# EAGLE board PowerConversionBoard (EAGLE 9.6.2)
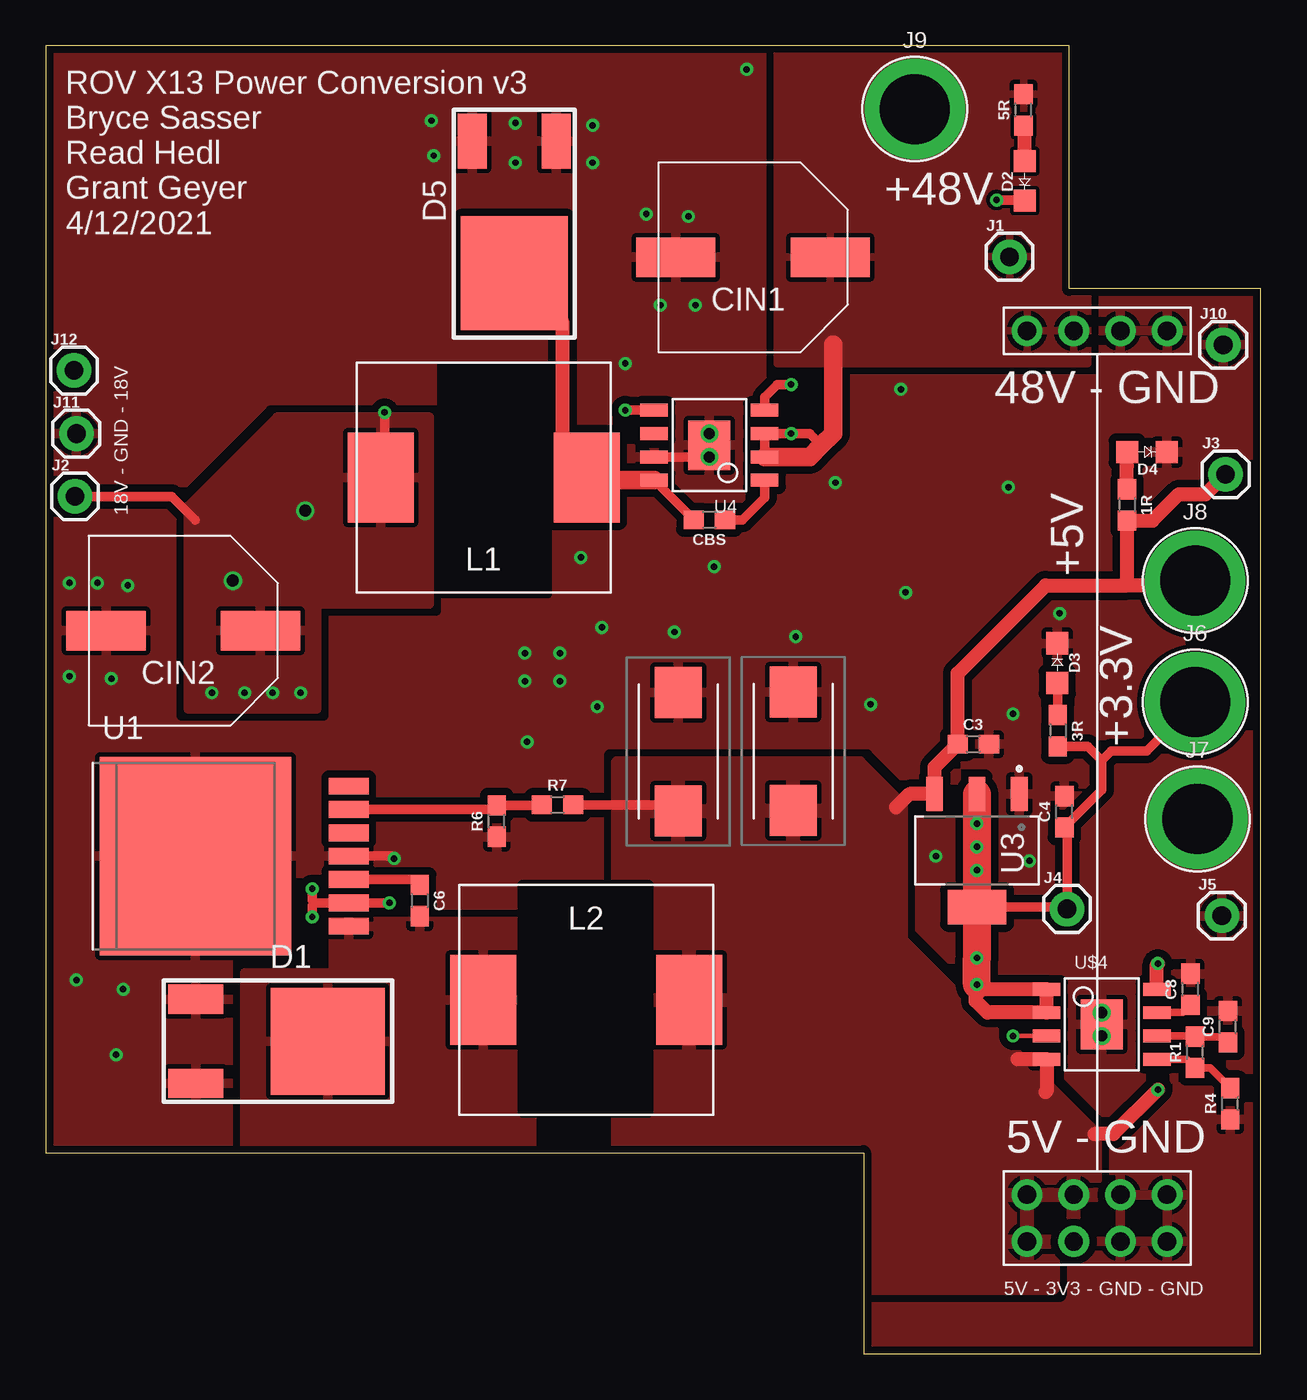
[diagram p0: board, top side]
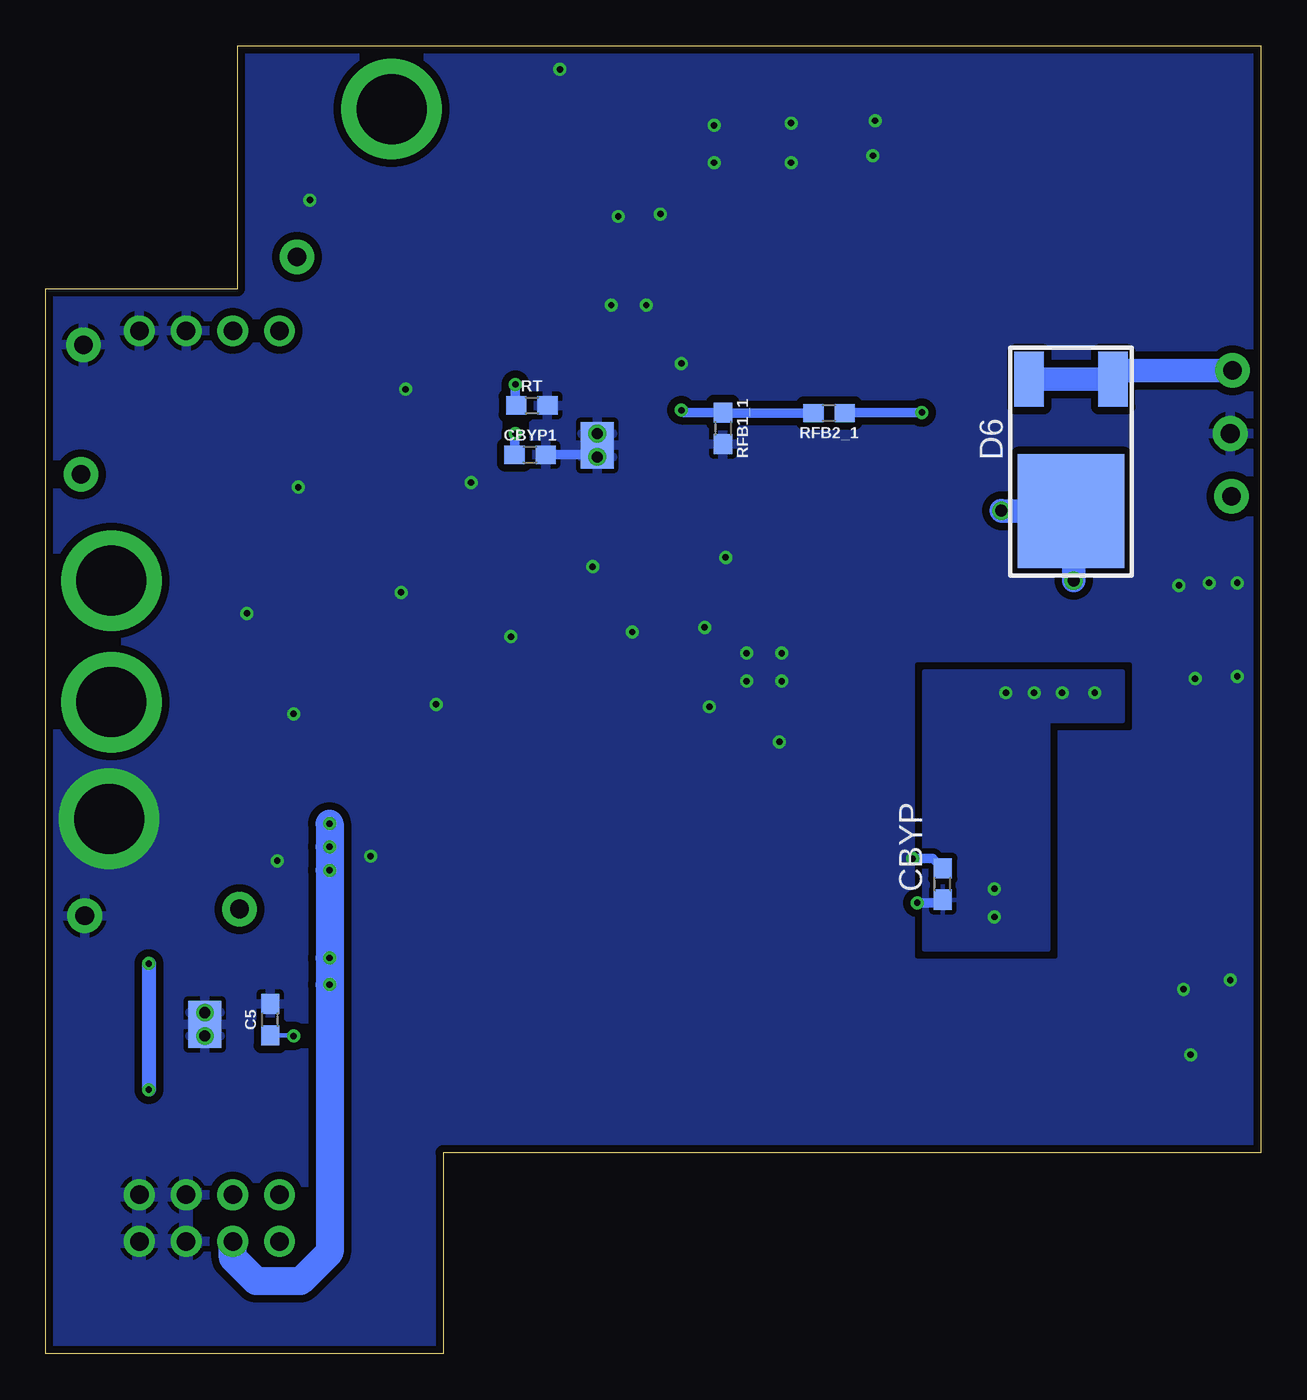
[diagram p1: board, bottom side, seen from below]

Size 66.04 x 71.12 mm. Coordinates in mm from the lower left corner, seen from the top.
Outline: 0,10.92 44.45,10.92 44.45,0 66.04,0 66.04,57.91 55.63,57.91 55.63,71.12 0,71.12 0,10.92
Copper layers (1*16): Top 0.0356mm / dielectric 1.5011mm / Bottom 0.0356mm
Design rules "ECE_Senior_Design": minimum track width 8mil, minimum drill 13mil, track to track 8mil, track to pad 8mil, pad to pad 6mil, via to via 8mil, smd to smd 6mil, copper to edge 15mil, drill to drill 8mil, minimum pad ring 7mil, minimum via ring 7mil, stop-mask expansion 3mil, vias tented up to drill 0mil, thermal gap 10mil

## Footprints (pad centres in the part's own frame; a part is rotated, then mirrored left to right if it is on the bottom)
0603 = smd 1.1 x 1: 1 -0.85,0; 2 0.85,0
CAPAE1030X1050N = smd 4.3 x 2.15: + -4.2,0; - 4.2,0
CTAN(7.30_4.30MM) = smd 2.77 x 2.55: + -3.22,0; - 3.22,0
DPAK-3 = smd 3 x 1.6: 1 -4.35,2.015; 3 -4.35,-2.555 | smd 6.2 x 5.8: 4 2.83,-0.27
0805 = smd 1.2 x 1.2: A 1.1,0; C -1.05,0
1X01 = drill 1.016 pad 1.88: 1 0,0
BANANA_CONN_NO_THERM = drill 3.81 pad 5.461: 1 0,0
HCMA1305 = smd 3.6 x 4.9: 1 -5.6,0; 2 5.6,0
D2PAK/TO-263 = smd 2.159 x 0.914: 1 8.331,-3.81; 2 8.331,-2.54; 3 8.331,-1.27; 4 8.331,0; 5 8.331,1.27; 6 8.331,2.54; 7 8.331,3.81 | smd 10.414 x 10.795: TAB 0,0
SOT230P700X180-4N = smd 1.86 x 0.9: 1 -3.075,2.3; 2 -3.075,0; 3 -3.075,-2.3 | smd 1.86 x 3.19: 4 3.075,0
8-SOIC-EP = smd 1.5 x 0.7: 1 -3,1.905; 2 -3,0.635; 3 -3,-0.635; 4 -3,-1.905; 5 3,-1.905; 6 3,-0.635; 7 3,0.635; 8 3,1.905 | smd 2.3 x 2.7: PAD 0,0 | smd 1.778 x 2.54 bottom: PAD_BOT 0,0 | drill 0.6: PAD_VIA1 0,0.635; PAD_VIA2 0,-0.635
CON2DIST = drill 1 pad 1.676: 1@1 -3.81,22.86; 1@2 -1.27,22.86; 2@1 1.27,22.86; 2@2 3.81,22.86; 3@1 -3.81,-26.67; 3@2 -3.81,-24.13; 3@3 -1.27,-24.13; 4 -1.27,-26.67; 5@1 1.27,-26.67; 5@2 1.27,-24.13; 5@3 3.81,-26.67; 5@4 3.81,-24.13

## Placement (x,y rotation side)
1R  470  [0603]  58.78,46.15 270 top
3R  470  [0603]  55.01,33.87 270 top
5R  5k  [0603]  53.15,67.64 90 top
C3  4.7uF  [0603]  50.42,33.15 0 top
C4  4.7uF  [0603]  55.37,29.46 90 top
C5  1.0uF  [0603]  53.85,18.16 90 bottom
C6  10nF  [0603]  20.32,24.64 270 top
C8  1.0uF  [0603]  62.23,19.81 90 top
C9  1.0uF  [0603]  64.26,17.78 90 top
CBS  0.1uF  [0603]  36.07,45.34 180 top
CBYP  1uF  [0603]  17.28,25.53 90 bottom
CBYP1  1uF  [0603]  39.72,48.88 0 bottom
CIN1  100uF  [CAPAE1030X1050N]  38.45,59.63 180 top
CIN2  47uF  [CAPAE1030X1050N]  7.46,39.32 180 top
COUT1_2  150uF  [CTAN(7.30_4.30MM)]  34.37,32.74 90 top
COUT2_2  150uF  [CTAN(7.30_4.30MM)]  40.64,32.77 90 top
D1  SWITCHMODE_SCHOTTKY  [DPAK-3]  12.49,17.25 0 top
D2  COLOR  [0805]  53.22,63.76 90 top
D3  COLOR  [0805]  54.98,37.58 270 top
D4  COLOR  [0805]  59.89,49.04 180 top
D5  SWITCHMODE_SCHOTTKY  [DPAK-3]  25.73,61.59 270 top
D6  SWITCHMODE_SCHOTTKY  [DPAK-3]  10.03,48.64 270 bottom
J1  [1X01]  52.4,59.65 0 top
J2  [1X01]  1.58,46.62 0 top
J3  [1X01]  64.14,47.82 0 top
J4  [1X01]  55.52,24.18 0 top
J5  [1X01]  63.93,23.81 0 top
J6  [BANANA_CONN_NO_THERM]  62.48,35.43 0 top
J7  [BANANA_CONN_NO_THERM]  62.61,29.08 0 top
J8  [BANANA_CONN_NO_THERM]  62.48,42.04 0 top
J9  [BANANA_CONN_NO_THERM]  47.24,67.69 0 top
J10  [1X01]  64.01,54.86 0 top
J11  [1X01]  1.65,50.04 0 top
J12  [1X01]  1.52,53.47 0 top
L1  47uH  [HCMA1305]  23.79,47.65 180 top
L2  15uH  [HCMA1305]  29.38,19.23 0 top
R1  [0603]  62.48,16.38 90 top
R4  [0603]  64.39,13.59 90 top
R6  10k  [0603]  24.51,28.96 90 top
R7  33k  [0603]  27.81,29.84 0 top
RFB1_1  10k  [0603]  29.24,50.32 270 bottom
RFB2_1  230k  [0603]  23.46,51.15 180 bottom
RT  49.9k  [0603]  39.62,51.56 0 bottom
U1  LM2678  [D2PAK/TO-263]  8.13,27.05 0 top
U3  AZ1117EH-3.3TRG1  [SOT230P700X180-4N]  50.62,27.36 270 top
U4  [8-SOIC-EP]  36.07,49.4 180 top
U$3  CON2DIST  [CON2DIST]  57.15,32.77 0 top
U$4  ADP7159ARDZ-04-R7  [8-SOIC-EP]  57.4,17.91 0 top

## Library data of the parts
1R 3R 5R = SparkFun-Resistors; PROD_ID: RES-07869
C3 C4 = SparkFun-Capacitors; PROD_ID: CAP-09137
C5 C8 C9 = SparkFun-Capacitors; PROD_ID: CAP-00868
C6 = SparkFun-Capacitors; PROD_ID: CAP-00867
CBS CBYP1 = SparkFun-Capacitors; PROD_ID: CAP-09633
CBYP = SparkFun-Capacitors; PROD_ID: CAP-09633; VALUE: 3.3nF
CIN1 CIN2 = brick-capacitor-UCM1H331MNL1GS; ARROW_PART_NUMBER: UCM1H331MNL1GS; ARROW_PRICE-STOCK: https://www.arrow.com/en/products/ucm1h331mnl1gs/nichicon; DESCRIPTION: Nichicon 330uF 50 V Aluminium Electrolytic Capacitor SMD, CM Series 2000h 10 (Dia.) x 10mm; HEIGHT: 10.5mm; MANUFACTURER_NAME: Nichicon; MANUFACTURER_PART_NUMBER: UCM1H331MNL1GS; MOUSER_PART_NUMBER: 647-UCM1H331MNL1GS; MOUSER_PRICE-STOCK: https://www.mouser.co.uk/ProductDetail/Nichicon/UCM1H331MNL1GS?qs=DSgADHjnLTkTovFLdbC%252BNg%3D%3D
COUT1_2 COUT2_2 = PowerComponents
D1 D5 D6 = Schottky Diode 8A - MBRD835LT4G
D2-D4 = LED-0805
J1-J5 J10-J12 = SparkFun-Connectors
J6-J9 = Banana Plug PTH
L1 L2 = Inductor_15uH - hcma1305
R1 R4 RFB1_1 RFB2_1 RT = SparkFun-Resistors
R6 = SparkFun-Resistors; PROD_ID: RES-00824
R7 = SparkFun-Resistors; PROD_ID: RES-08416
U1 U4 = IC, Buck Controller - LM2678, LM2576
U3 = Linear Regulator - AZ1117EH-3.3TRG1; AVAILABILITY: Unavailable; DESCRIPTION: Ldo.Vreg Pos 3, 3v 1a Sot223; MF: Diodes Inc.; MP: AZ1117EH-3.3TRG1; PACKAGE: SOT-223 Diodes Inc.; PRICE: None
U$3 = Dist_Convert_Connector
U$4 = Linear Regulator - ADP7159

## Nets
3V3: 3R.2 C4.1 J4.1 J6.1 U3.2 U3.4 U$3.4 U$4.1 U$4.2
5V: 1R.2 C3.1 COUT1_2.+ COUT2_2.+ J3.1 J8.1 L2.2 R7.2 U3.3 U$3.3@1 U$3.3@2 U$3.3@3 U$4.4 U$4.8
18V: CBYP.1 CIN2.+ D6.4 J2.1 L1.2 RFB2_1.1 U1.2
18V_EXT: D6.1 D6.3 J12.1
48V: 5R.2 CBYP1.1 CIN1.+ J1.1 J9.1 U4.2 U4.3 U$3.1@1 U$3.1@2
BOOTSTRAP: CBS.1 U4.1
BST: C6.1 U1.3
BYP: C5.1 U$4.3
FB1: RFB1_1.1 RFB2_1.2 U4.5
FB2: R6.2 R7.1 U1.6
GND: C3.2 C4.2 C5.2 C8.2 C9.2 CBYP1.2 CBYP.2 CIN1.- CIN2.- COUT1_2.- COUT2_2.- D1.1 D1.3 D2.C D3.C D4.C D5.1 D5.3 J5.1 J7.1 J10.1 J11.1 R4.1 R6.1 RFB1_1.2 RT.2 U1.4 U1.TAB U3.1 U4.7 U4.PAD U4.PAD_BOT U4.PAD_VIA1 U4.PAD_VIA2 U$3.2@1 U$3.2@2 U$3.5@1 U$3.5@2 U$3.5@3 U$3.5@4 U$4.PAD U$4.PAD_BOT U$4.PAD_VIA1 U$4.PAD_VIA2
N$4: 5R.1 D2.A
N$5: 3R.1 D3.A
N$6: 1R.1 D4.A
REF: C9.1 R1.2 U$4.6
REF_SENSE: R1.1 R4.2 U$4.5
RT: RT.1 U4.4
SWITCH1: CBS.2 D5.4 L1.1 U4.8
SWITCH2: C6.2 D1.4 L2.1 U1.1
VREG: C8.1 U$4.7

## Tracks (layer width: path | path; a pad name or v marks a point on that pad's centre or on a via)
3V3  (via drill 0.35)
  Top 0.508: U3.4 55.42,24.28 J4.1 55.52,28.47 C4.1 57.4,30.65 57.4,32.26 | 57.4,32.26 56.64,33.02 3R.2 | 57.4,32.26 57.91,32.77 59.86,32.77 62.48,35.39 J6.1
  Top 0.762: 50.87,19.81 U$4.1 U$4.2 51.18,18.54 50.55,19.18 50.55,19.49 50.87,19.81 | 50.87,19.81 v50.62,20.07
  Top 1.524: U3.2 v50.62,28.83 v50.62,27.56 v50.62,26.29 U3.4 v50.62,21.52 v50.62,20.07
  Bottom 1.524: U$3.4 55.88,5.21 54.61,3.94 52.2,3.94 50.62,5.52 v50.62,20.07 v50.62,21.52 v50.62,26.29 v50.62,27.56 v50.62,28.83
5V  (via drill 0.35)
  Top 0.508: R7.2 34.05,29.84 COUT1_2.+
  Top 0.762: 46.23,29.72 46.94,30.43 U3.3 48.32,31.9 C3.1 49.57,37 54.36,41.78 58.8,41.78 58.78,41.81 | 58.78,41.81 1R.2 60.16,45.3 61.59,46.74 63.05,46.74 J3.1 | 54.36,14.22 54.4,14.27 U$4.4 52.83,16 | U$4.8 60.4,21.16 v60.45,21.21 | v60.45,14.35 58.04,11.94 57.02,11.94 | 58.78,41.81 62.26,41.81 J8.1
  Bottom 0.762: v60.45,21.21 v60.45,14.35
  pour Top (isolate 0.406): 31.12,10.67 31.12,32.13 44.2,32.13 46.48,29.84 46.48,22.48 57.02,11.94 57.02,7.37 54.74,7.37 54.74,3.56 38.23,3.56
18V  (via drill 0.35, 0.65)
  Top 0.508: J2.1 6.85,46.62 8.13,45.34 | v18.67,24.51 U1.2 14.6,24.51 | 14.6,24.51 14.48,24.38 v14.48,23.75 | 14.6,24.51 14.48,24.64 v14.48,25.27 | L1.2 18.41,47.87 v18.41,51.18
  Bottom 0.508: v18.67,24.51 17.45,24.51 CBYP.1 | RFB2_1.1 22.58,51.18 v18.41,51.18
  Bottom 1.27: v14.1,45.85 14.06,45.81 D6.4 10.16,45.67 v10.16,42.04
  other vias: 9.02,35.94 10.79,35.94 12.32,35.94 13.84,35.94
  pour Top (isolate 0.406): 7.75,35.05 7.75,46.1 12.57,50.93 20.83,50.93 20.83,40.77 14.73,40.77 14.73,35.05
  pour Bottom (isolate 0.305): 7.49,37.08 18.29,37.08 18.29,21.97 11.56,21.97 11.56,34.42 7.49,34.42
18V_EXT
  Bottom 1.27: J12.1 7.54,53.47 D6.1 D6.3
48V  (via drill 0.35)
  Top 0.508: U4.2 U4.3 v40.51,50.04 41.53,50.04 42.16,49.4
  Top 1.016: U4.2 41.53,48.77 42.16,49.4 42.8,50.04 42.8,54.86
  Bottom 0.508: CBYP1.1 40.56,49.99 v40.51,50.04
  pour Top: 56.64,53.85 56.64,72.9 39.75,72.9 39.75,53.85
BOOTSTRAP
  Top 0.508: CBS.1 37.85,45.34 39.07,46.56 U4.1
BST
  Top 0.508: U1.3 20.03,25.78 C6.1
BYP  (via drill 0.35)
  Top 0.254: U$4.3 v52.58,17.27
  Bottom 0.254: v52.58,17.27 52.62,17.31 C5.1
FB1  (via drill 0.35)
  Top 0.508: U4.5 v31.5,51.31
  Bottom 0.508: RFB2_1.2 29.21,51.15 RFB1_1.1 31.36,51.17 v31.5,51.31
FB2
  Top 0.508: U1.6 24.3,29.59 R6.2 26.92,29.81 R7.1
GND  (via drill 0.35)
  Top 0.508: U1.4 18.8,27.05 v18.92,26.92 | D2.C 53.18,62.74 v51.69,62.74 | U4.7 U4.PAD_VIA1
  Bottom 0.508: v18.92,26.92 17.83,26.92 CBYP.2 | CBYP1.2 36.18,48.88 U4.PAD_VIA1
  other vias: 1.27,41.91 4.45,41.78 2.79,41.91 1.27,36.83 3.56,36.7 3.81,16.26 1.65,20.32 26.03,38.1 26.03,36.58 27.94,38.1 27.94,36.58 26.16,33.27 29.97,35.18 30.23,39.5 34.16,39.24 40.77,38.99 44.83,35.31 52.58,34.8 53.47,26.8 48.39,27.05 4.19,19.81 55.12,40.26 46.74,41.4 52.32,47.12 46.48,52.45 35.31,57.02 33.4,57.02 34.92,61.85 38.1,69.85 29.72,66.8 29.72,64.77 25.53,64.77 25.53,66.93 20.95,67.06 21.08,65.15 32.64,61.98 31.5,53.85 29.08,43.31 36.32,42.8 42.93,47.37
  pour Top (isolate 0.406, rank 6): -0.51,-0.92 -0.51,71.4 66.64,71.4 66.64,-0.92
  pour Bottom (isolate 0.406, rank 6): -0.48,-0.57 -0.48,71.43 66.89,71.43 66.89,-0.57
  pour Bottom: 57.91,3.81 57.91,10.79 63.63,10.79 63.63,3.81
N$4
  Top 0.762: D2.A 53.21,66.73 5R.1
N$5
  Top 0.508: 3R.1 55.01,36.2 D3.A
N$6
  Top 0.762: 1R.1 58.78,48.27 D4.A
REF
  Top 0.406: U$4.6 62.45,17.27 R1.2 63.96,17.23 C9.1
REF_SENSE
  Top 0.406: U$4.5 62.01,16 R1.1 63.29,15.53 R4.2
RT  (via drill 0.35)
  Top 0.508: U4.4 39.07,52.02 39.75,52.7 v40.51,52.7
  Bottom 0.508: v40.51,52.7 40.51,51.6 RT.1
SWITCH1
  Top 0.508: U4.8 CBS.2
  Top 0.762: D5.4 28.07,56.15 28.07,48.98 L1.1
  Top 1.016: U4.8 29.55,47.5 L1.1
SWITCH2
  Top 0.406: L2.1 22.84,20.17
  pour Top (isolate 0.305): 10.79,10.29 10.79,20.7 15.62,20.7 15.62,23.5 26.42,23.5 26.42,10.29
VREG
  Top 0.406: C8.1 61.81,18.54 U$4.7
X
  cutout Top: 25.91,25.53 25.91,13.08 32.77,13.08 32.77,25.53
X1
  cutout Top: 21.46,41.27 21.46,53.72 27.3,53.72 27.3,41.27

## Text on the board
tNames: +48V | ROV X13 Power Conversion v3 / Bryce Sasser / Read Hedl / Grant Geyer / 4/12/2021 | 48V - GND | 18V - GND - 18V | +5V | +3.3V | 5V - GND | 5V - 3V3 - GND - GND